# Altium PCB dctr_v1.3.pcbDoc
Units mil, origin at the board's own origin, x right, y up, seen from the top; angles counter-clockwise.
Board outline 7352.55 x 4561.21 mil, 2 copper layers (Top Layer, Bottom Layer); 53 components, 67 nets, 229 pads, 51 vias.
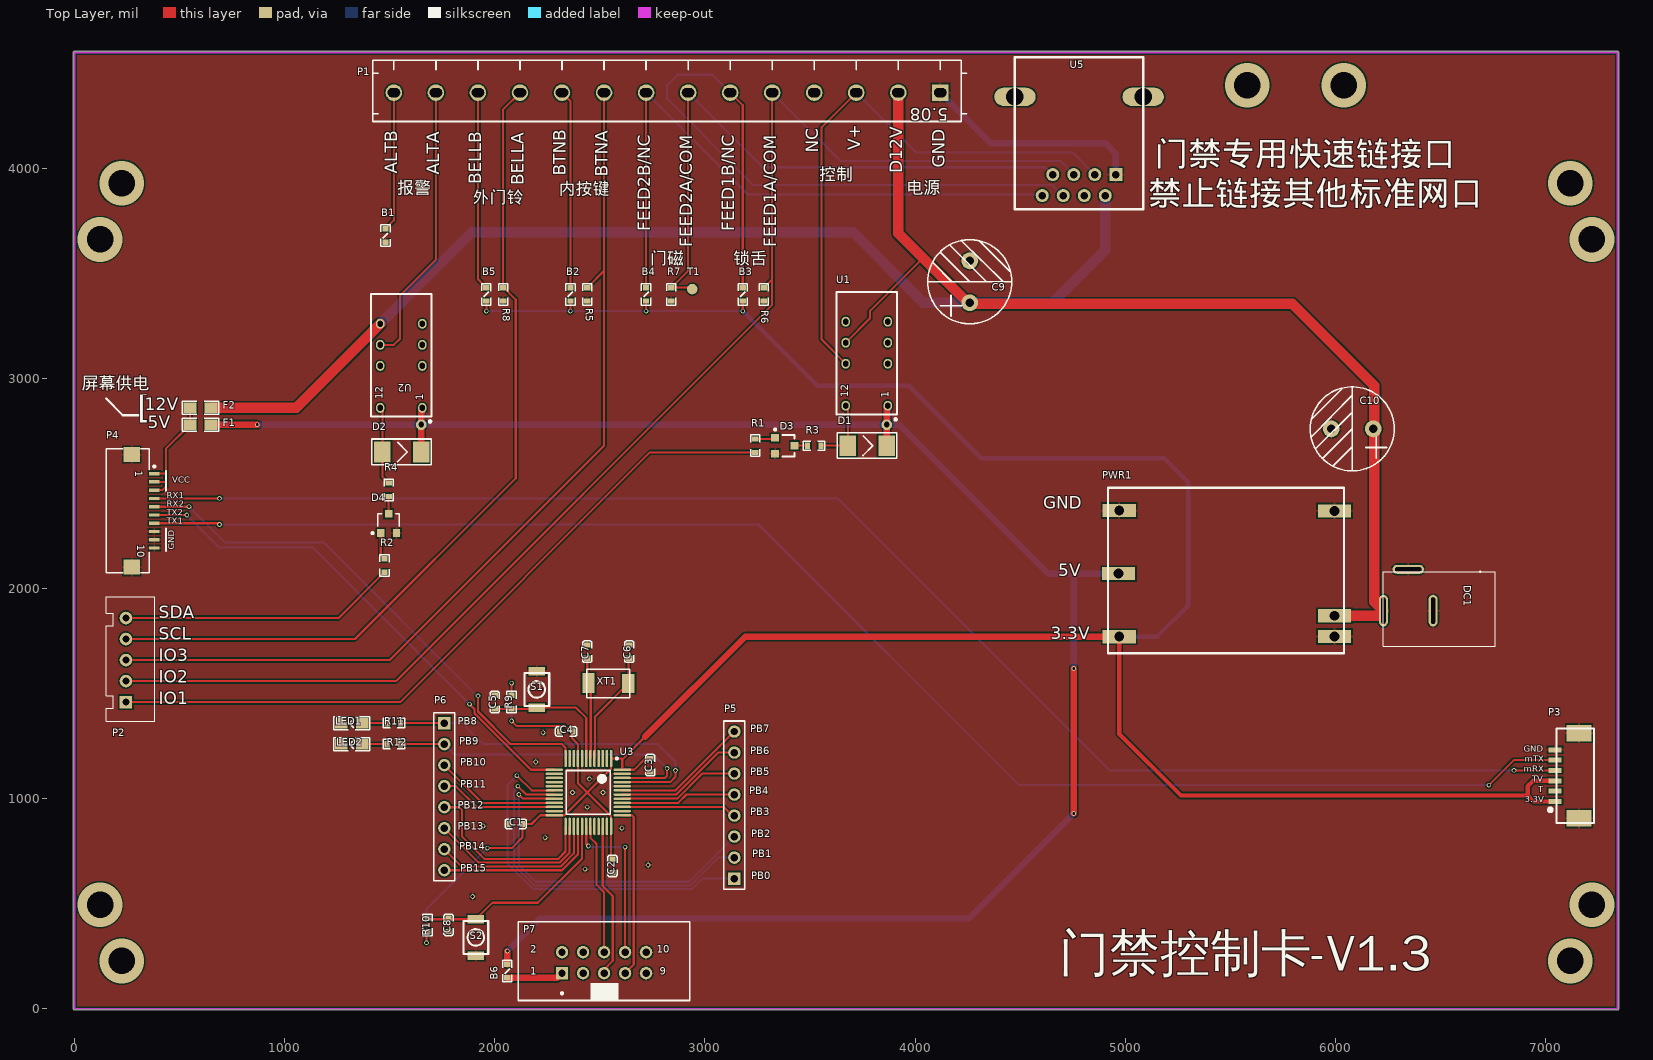
[diagram p0: Top Layer view]
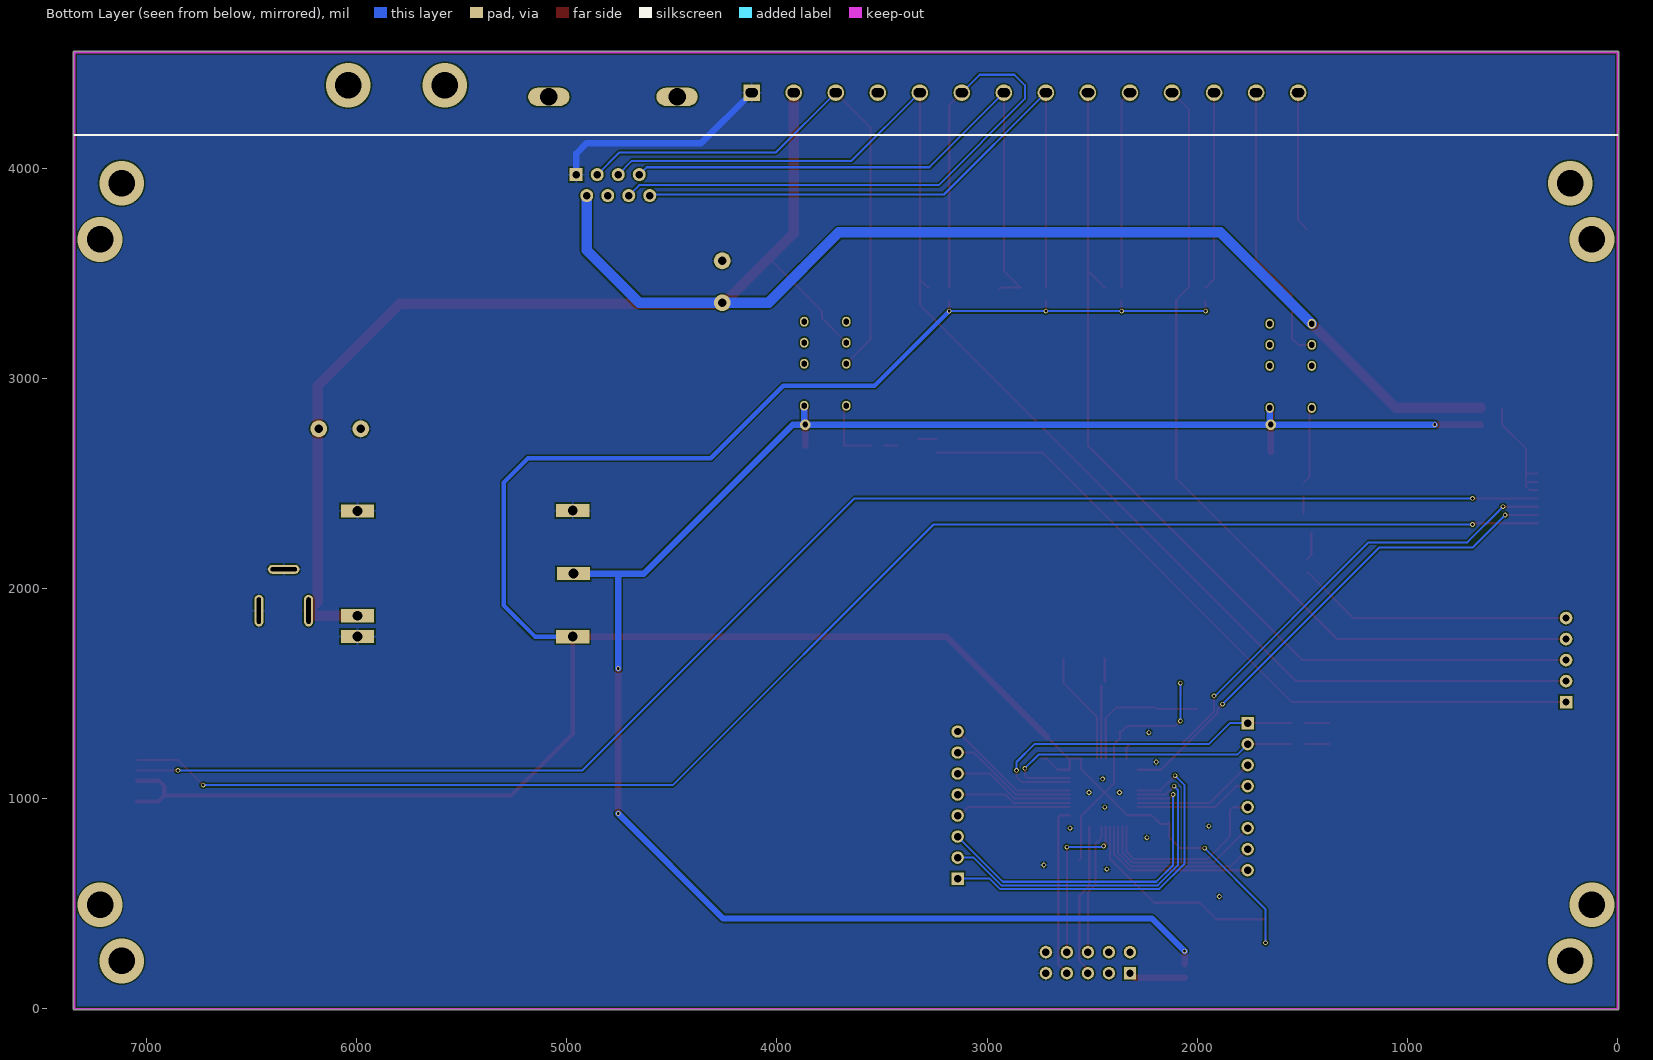
[diagram p1: Bottom Layer view, seen from below]

## Layer stack, top to bottom
Top Layer: signal copper 1.4
Dielectric: dielectric 12.6, FR-4, Dk 4.8
Bottom Layer: signal copper 1.4

## Board outline
0,-5.01 cw(c0,0) -5.01,0 -5.01,4551.18 cw(c0,4551.18) 0,4556.2 7342.52,4556.2 cw(c7342.52,4551.18) 7347.53,4551.18 cw(c7342.52,4551.18) 7347.5,4550.59 cw(c7342.52,4550) 7347.53,4550 7347.53,0 cw(c7342.52,0) 7342.52,-5.01

## Design rules (kind name [scope] priority, off if disabled: settings)
Clearance [All] p1: gap=7
ComponentClearance [All] p1: gap=0 collisioncheckmode=3 verticalgap=0 showdistances=FALSE
HoleSize [All] p1: absolutevalues=TRUE maxlimit=1000 minlimit=1 maxpercent=80.000 minpercent=20.000
HoleToHoleClearance [All] p1: gap=7 allowstackedmicrovias=TRUE
MinimumSolderMaskSliver [All] p1: minsoldermaskwidth=0
PolygonConnect [All] p1: connectstyle=Relief reliefconductorwidth=10 reliefentries=4 polygonreliefangle="90 Angle"
RoomDefinition MCU [InComponentClass('MCU')] p1: confinementstyle=ConfineIn formatcopy=TRUE lockcomponents=FALSE outline -1000,-1000 1000,-1000 1000,0 -1000,0
RoutingVias [All] p1: holewidth=14 width=22 viastyle="Through Hole" minholewidth=14 minwidth=22 maxholewidth=280 maxwidth=500
SilkToSilkClearance [All] p1: silktosilkclearance=0
SilkscreenOverComponentPads [All] p1: minsilkscreentomaskgap=0
SolderMaskExpansion [All] p1: expansion=4
TestPointUsage [All] p1: valid=0 allowmultiple=FALSE
Testpoint [All] p1: side=15 testpointundercomponent=TRUE minsize=40 maxsize=100 preferedsize=60 minholesize=0 maxholesize=40 preferedholesize=32 testpointgrid=1 style=1023 order=0123456789
Width [All] p1: maxlimit=100 minlimit=7 preferedwidth=7
18 further rules are at their usual default settings.

## Classes and differential pairs
component class MCU: B6 C1 C2 C3 C4 C5 C6 C7 C8 LED1 LED2 P5 P6 P7 R9 R10 R11 R12 S1 S2 U3 XT1
component class IO: B1 B2 B3 B4 B5 B? C9 C10 C11 D1 D2 D3 D4 D6 D? DC1 F1 F2 P1 P2 P3 P4 P8 PWR1 R1 R2 R3 R4 R5 R6 R7 R8 R? T1 U1 U2 U5

## Components (designator, comment, footprint, x,y, rotation, side; value= is the part's Value field where it differs from the comment)
B1 "BEAD" 0603L 1480,3680 r90 top
B2 "BEAD" 0603L 2360,3400 r90 top
B3 "BEAD" 0603L 3180,3400 r90 top
B4 "BEAD" 0603L 2720,3400 r90 top
B5 "BEAD" 0603L 1960,3400 r90 top
B6 "BEAD" 0603L 2060,180 r90 top
C1 "104" 0603C 2100,880 r0 top
C2 "104" 0603C 2560,680 r90 top
C3 "104" 0603C 2740,1160 r270 top
C4 "104" 0603C 2340,1320 r0 top
C5 "104" 0603C 2000,1460 r90 top
C6 "22P" 0603C 2640,1700 r90 top
C7 "22P" 0603C 2440,1700 r90 top
C8 "104" 0603C 1780,400 r90 top
C9 "220uF" RB.2/.4 4260,3360 r270 top
C10 "220uF" RB.2/.4 6180,2760 r0 top
D1 "D-S" DO-214AC(SMA) 3630,2620 r0 top
D2 "D-S" DO-214AC(SMA) 1415,2590 r0 top
D3 "AO3400A" SOT23A 3380,2680 r270 top
D4 "AO3400A" SOT23A 1495,2310 r0 top
DC1 "DC" DC005 6760,2080 r180 top
F1 "FUSE" 0805F 600,2780 r180 top
F2 "FUSE" 0805F 600,2860 r180 top
LED1 "LED" 0805D 1320,1360 r180 top
LED2 "LED" 0805D 1320,1260 r180 top
P1 "Header 14" KF128-5.08-14 3020,4360 r180 top
P2 "Header 5" XH2.54-5 245,1660 r90 top
P3 "Header 8" FPC/1.25T-6P 7045,1110 r90 top
P4 "Header 12" FFC/SM1.0-2H10 380,2370 r270 top
P5 "Header 8" HDR1X8 3140,620 r90 top
P6 "Header 8" HDR1X8 1760,1360 r270 top
P7 "Xdebug-V4" DC2.54-10 2520,220 r0 top
PWR1 "PWR-1" PWR-1 6040,2480 r180 top
R1 "10K" 0603R 3240,2680 r270 top
R2 "10K" 0603R 1475,2110 r270 top
R3 "10K" 0603R 3520,2680 r180 top
R4 "10K" 0603R 1495,2470 r270 top
R5 "10K" 0603R 2440,3400 r270 top
R6 "10K" 0603R 3280,3400 r270 top
R7 "10K" 0603R 2840,3400 r270 top
R8 "10K" 0603R 2040,3400 r270 top
R9 "10K" 0603R 2080,1460 r270 top
R10 "10K" 0603R 1680,400 r90 top
R11 "1.5K" 0603R 1520,1360 r180 top
R12 "1.5K" 0603R 1520,1260 r180 top
S1 "BUTTON" SW-3X4X2 2200,1520 r270 top
S2 "BUTTON" SW-3X4X2 1910,340 r270 top
T1 "TP" TP1 2940,3425 r0 top
U1 "JDQ(G6S-2)" JDQ-G6S-2 3770,3120 r90 top
U2 "JDQ(G6S-2)" JDQ-G6S-2 1555,3110 r90 top
U3 "STM32F103" LQFP48 2445,1030 r270 top
U5 "RJ45-DTE" RJ45 4780,4220 r0 top
XT1 "8M" 5032 2540,1550 r180 top

## Footprints (in the part's own frame and the unit in brackets; to place one, negate y for a bottom-side part, rotate by r counter-clockwise, add the part's x,y. Pads: shape width x height; smd on the part's side, far side on the other; paste and mask are expansions set on the pad)
0603C [mil]
  rect 25x30 smd: 1(-32,0) 2(32,0)
  silkscreen extent -51,-22 51,22
0603L [mil]
  rect 25x30 smd: 1(-32,0) 2(32,0)
  silkscreen extent -51,-22 51,22
0603R [mil]
  rect 25x30 smd: 1(-32,0) 2(32,0)
  silkscreen extent -51,-22 51,22
0805D [mil]
  rect 60x49.21 smd: A(-50,0) K(50,0)
  silkscreen extent -85,-31 86,32
0805F [mil]
  rect 60x49.21 smd: 1(-50,0) 2(50,0)
  silkscreen extent -87,-31 86,31
5032 [mm]
  rect 1.5x2.3 smd: 1(-2.438,0.025)
  rect 1.5x2.4 smd: 2(2.388,0)
  silkscreen extent -2.59,-1.7 2.59,1.75
DC2.54-10 [mm] "Connector; IDC, PCB Transition - 2 Rows, Thru-Hole; 10 Position; Vertical; Pitch 2.54 mm; Body 18.00 x 6.1 x 7.45 mm (LxWxH)"
  rect 1.5x1.5 hole 0.9: 1(-5.08,-1.27)
  round 1.5 hole 0.9: 2(-5.08,1.27) 3(-2.54,-1.27) 4(-2.54,1.27) 5(0,-1.27) 6(0,1.27) 7(2.54,-1.27) 8(2.54,1.27) 9(5.08,-1.27) 10(5.08,1.27)
  silkscreen extent -10.39,-4.57 10.36,4.93
DC005 [mm] "9*13.5*10( 外径5.5mm 内径2.1mm)"
  oval 1.1x3.8 hole 0.5 slot 3.2 at 90 deg: 1(13.5,4.7) 2(7.5,4.7)
  oval 3.8x1.1 hole 0.5 slot 3.2 at 0 deg: 3(10.5,-0.3)
  silkscreen extent 0,0 13.5,9
DO-214AC(SMA) [mm]
  rect 2x2.5 smd: A(1.27,1.524) K(5.969,1.524)
  silkscreen extent 0,0 7.19,3.1
FFC/SM1.0-2H10 [mm] "Connector; FH12 Series; 6 Position; 1.0mm Spaced Bottom Eccentric Contact"
  rect 0.4x1.25 smd: 1(-4.5,0) 2(-3.5,0) 3(-2.5,0) 4(-1.5,0) 5(-0.5,0) 6(0.5,0) 7(1.5,0) 8(2.5,0) 9(3.5,0) 10(4.5,0)
  rect 1.8x2 smd: 11(-6.8,-2.725) 12(6.8,-2.725)
  silkscreen extent -7.5,-5.82 7.5,0.13
FPC/1.25T-6P [mm]
  rect 0.6x1.6 smd: 1(-3.125,0) 2(-1.875,0) 3(-0.625,0) 4(0.625,0) 5(1.875,0) 6(3.125,0)
  rect 2x3 smd: 7(-5.15,-2.9) 8(5.15,-2.9)
  silkscreen extent -5.7,-4.7 5.7,0.71
HDR1X8 [mm]
  rect 1.5x1.5 hole 0.9: 1(0,0)
  round 1.5 hole 0.9: 2(2.54,0) 3(5.08,0) 4(7.62,0) 5(10.16,0) 6(12.7,0) 7(15.24,0) 8(17.78,0)
  silkscreen extent -1.27,-1.27 19.05,1.27
JDQ-G6S-2 [mm] "继电器（G6S-2） 5VDC"
  oval 1.2x1 hole 0.6 slot 0.7 at 0 deg: 1(-6.35,-2.54) 3(-1.27,-2.54) 4(1.27,-2.54) 5(3.81,-2.54) 8(3.81,2.54) 9(1.27,2.54) 10(-1.27,2.54) 12(-6.35,2.54)
  silkscreen extent -8.14,-3.65 7.4,3.65
KF128-5.08-14 [mm]
  rect 2x2 hole 1.1 slot 1.5 at 0 deg: 1(-27.94,0)
  round 2 hole 1.1 slot 1.5 at 0 deg: 2(-22.86,0) 3(-17.78,0) 4(-12.7,0) 5(-7.62,0) 6(-2.54,0) 7(2.54,0) 8(7.62,0) 9(12.7,0) 10(17.78,0) 11(22.86,0) 12(27.94,0) 13(33.02,0) 14(38.1,0)
  silkscreen extent -31.14,-3.9 40.64,3.5
LQFP48 [mm]
  oval 2.1x0.3 smd: 1(-4.1,2.75) 2(-4.1,2.25) 3(-4.1,1.75) 4(-4.1,1.25) 5(-4.1,0.75) 6(-4.1,0.25) 7(-4.1,-0.25) 8(-4.1,-0.75) 9(-4.1,-1.25) 10(-4.1,-1.75) 11(-4.1,-2.25) 12(-4.1,-2.75) 25(4.1,-2.75) 26(4.1,-2.25) 27(4.1,-1.75) 28(4.1,-1.25) 29(4.1,-0.75) 30(4.1,-0.25) 31(4.1,0.25) 32(4.1,0.75) 33(4.1,1.25) 34(4.1,1.75) 35(4.1,2.25) 36(4.1,2.75)
  oval 0.3x2.1 smd: 13(-2.75,-4.1) 14(-2.25,-4.1) 15(-1.75,-4.1) 16(-1.25,-4.1) 17(-0.75,-4.1) 18(-0.25,-4.1) 19(0.25,-4.1) 20(0.75,-4.1) 21(1.25,-4.1) 22(1.75,-4.1) 23(2.25,-4.1) 24(2.75,-4.1) 37(2.75,4.1) 38(2.25,4.1) 39(1.75,4.1) 40(1.25,4.1) 41(0.75,4.1) 42(0.25,4.1) 43(-0.25,4.1) 44(-0.75,4.1) 45(-1.25,4.1) 46(-1.75,4.1) 47(-2.25,4.1) 48(-2.75,4.1)
  silkscreen extent -4.22,-2.65 2.65,3.57
PWR-1 [mm]
  rect 4x1.6 hole 1.2: 1(1.125,17.975) 2(1.125,15.475) 3(1.125,2.8) 4(27.141,2.76) 5(27.225,10.38) 6(27.141,18)
  silkscreen extent 0,0 28.5,20
RB.2/.4 [mil] "10x12.5x5.0mm"
  round 80 hole 40: 1(0,0) 2(-200,0)
  silkscreen extent -300,-200 100,200
RJ45 [mil]
  oval 196.85x86.61 hole 82.68: 0(-305.12,120.08) 0(305.12,120.08)
  rect 62x62 hole 35: 1(175,-250)
  round 62 hole 35: 2(125,-350) 3(75,-250) 4(25,-350) 5(-25,-250) 6(-75,-350) 7(-125,-250) 8(-175,-350)
  silkscreen extent -305,-416 305,309
SOT23A [mm] "SOT-23; 3 Leads; Body 3.0 x 2.5 mm, inc. leads (LxW max)"
  rect 0.9x0.95 smd: 1(-0.95,-1.175) 2(0.95,-1.175) 3(0,1.175)
  silkscreen extent -2.07,-1.3 1.3,1.18
SW-3X4X2 [mm] "3X4X2 小龟二脚开关按键"
  rect 1x2 smd: 1(-2.2,0) 2(2.2,0)
  silkscreen extent -2,-1.5 2,1.5
TP1 [mil]
  round 50 smd: 1(0,0)
XH2.54-5 [mil]
  rect 60x60 hole 32: 1(-200,0)
  round 60 hole 32: 2(-100,0) 3(0,0) 4(100,0) 5(200,0)
  silkscreen extent -292,-136 301,94

## Part data
B1 B2 B3 B4 B5 B6: "磁珠"
C1 C2 C3 C4 C5 C6 C7 C8: library part CAP, "普通小电容"
C9 C10: library part CAP-E, "电解电容"
D1 D2: "肖特基二极管"
D3 D4: library part MOS-N, "NMOS"
DC1: library part DC00X, "圆形电源接口"
F1 F2: "CR-1812-050A60V"
P1: "Header, 14-Pin"
P2: "Header, 5-Pin"
P3 P5 P6: "Header, 8-Pin"
P4: "Header, 12-Pin"
P7: "单片机端"
R1 R2 R3 R4 R5 R6 R7 R8 R9 R10 R11 R12: library part RES, "普通电阻"
T1: "testpoint"
U1 U2: "继电器（G6S-2 5VDC）"
XT1: library part XT, "晶振"

## Via types
v1: diameter 22, hole 14, Top Layer to Bottom Layer, 39 vias
v2: diameter 212.6, hole 125.98, Top Layer to Bottom Layer, 8 vias
v3: diameter 212.6, hole 125.98, Top Layer to Bottom Layer, tented both sides, 2 vias
v4: diameter 50, hole 28, Top Layer to Bottom Layer, 2 vias

## Nets (pads, with @x,y where several pads share a name; then routed paths per layer and width w, separated by ;. In a path a pad name is that pad's centre, name@x,y a point inside that pad or via, vN(x,y) a via of type N, cw(c..) or ccw(c..) an arc to the next point about the centre after c; other vN are vias at no path point)
ALT_A: P1.13 U2.9 | length 1347.8
  Top Layer w10: U2.9 1520,3160 1550,3190 1550,3395 1720,3565 P1.13
ALT_B: B1.2 P1.14 | length 664.6
  Top Layer w10: B1.2 1520,3752 P1.14
BELL_A: P1.11 P2.4 R8.1 | length 4064.9
  Top Layer w10: P2.4 1335,1760 2100,2525 2100,3375 2040,3435 2040,4280 P1.11
BELL_B: B5.2 P1.12 | length 944.6
  Top Layer w10: P1.12 1920,3472 B5.2
BTN_A: P1.9 P2.3 R5.1 | length 4490.6
  Top Layer w10: P2.3 1500,1660 2520,2680 2520,3512 ; R5.1 2520,3512 ; P1.9 2520,3512
BTN_B: B2.2 P1.10 | length 944.6
  Top Layer w10: P1.10 2360,4320 B2.2
D3V3: B2.1 B3.1 B4.1 B5.1 C1.2 C2.2 C3.1 C4.2 P3.1 P3.3 PWR1.6 R9.1 R10.1 U3.1 U3.9 U3.24 U3.36 U3.48 | length 13255.7
  Top Layer w10: v1(1675,315) R10.1@1675,363 ; v1(1960,3320) B5.1 ; v1(1965,765) 2080,765 2132,817 C1.2 ; v1(2080,1370) 2103,1347 2332.5,1347 2359.5,1320 C4.2@2368,1320 ; R9.1 v1(2080,1550) ; C1.2@2132,888 2140,880 2175,880 2216.73,921.73 U3.24 2328.94,921.73 ; 2329.13,921.92 2331.92,921.92 2440,1030 ; v1(2360,3320) B2.1 ; C4.2 C4.2@2368,1320 ; C2.2 2553.27,718.73 U3.36 2553.08,868.77 2553.08,916.92 2440,1030 ; 2715,1295 2606.42,1186.42 ; v1(2720,3320) B4.1 ; C3.1 2717,1192 2663.27,1138.27 U3.48 2606.42,1186.42 ; v1(3180,3320) B3.1 ; C4.2@2368,1320 2368,1287 2395.79,1259.21 U3.9 2395.79,1074.21 2440,1030 ; 2440,1030 2553.27,1143.27 U3.1 2601.42,1191.42 2606.42,1186.42
  Top Layer w20: PWR1.6 4971.47,1308.53 5265,1015 6915,1015 ; P3.1 6943.03,986.97 6915,1015 ; P3.3 6940.39,1085.39 6915,1060 6915,1015
  Top Layer w30: 2715,1295 3191.34,1771.34 PWR1.6
  Bottom Layer w10: v1(1675,315) 1675,475 v1(1965,765) ; v1(1960,3320) v1(2360,3320) v1(2720,3320) v1(3180,3320) ; v1(2080,1370) v1(2080,1550)
  Bottom Layer w20: v1(3180,3320) 3535,2965 3970,2965 4315,2620 5185,2620 5300,2505 5300,1920 5151.34,1771.34 PWR1.6
D5V: B6.2 D1.K D2.K F1.1 PWR1.5 U1.1 U2.1 | length 9342.3
  Top Layer w30: F1.1 v1(870,2780) ; D2.K v4(1650,2780) U2.1@1650,2855 ; B6.2 v1(2060,275) ; D1.K v4(3865,2780) U1.1@3865,2865 ; v1(4755,930) v1(4755,1620)
  Bottom Layer w30: v1(870,2780) v4(1650,2780) v4@1655,2780 ; U2.1 v4@1655,2780 ; v1(2060,275) 2215,430 4255,430 v1(4755,930) ; U1.1 v4@3870,2780 ; v1(4755,1620) 4755,2071.34 ; PWR1.5 4755,2071.34 ; v4@1655,2780 v4(3865,2780) v4@3870,2780 ; v4@3870,2780 3925,2780 4633.66,2071.34 4755,2071.34
D12V: C9.1 C10.1 DC1.1 F2.1 P1.2 PWR1.2 U1.9 U2.8 U5.2 | length 10206.4
  Top Layer w10: U1.9 3785,3285 3785,3320 4025,3560
  Top Layer w50: F2.1 1055,2860 U2.8 ; P1.2 3920,3690 4255,3355 5795,3355 6185,2965 6185,1938.46 DC1.1 6204.29,1870.75 PWR1.2
  Bottom Layer w50: U2.8 1890,3695 3705,3695 4040,3360 C9.1 4655,3360 4905,3610 U5.2
FEED1_A: P1.5 P2.2 R6.1 U5.5 | length 6479.6
  Top Layer w10: P2.2 1530,1560 3320,3350 3320,3472 ; R6.1 3320,3472 ; P1.5 3320,3472
  Bottom Layer w10: P1.5 3645,4035 4690,4035 U5.5
FEED1_B: B3.2 P1.6 U5.6 | length 3449.3
  Top Layer w10: P1.6 3180,4300 B3.2
  Bottom Layer w10: P1.6 3035,4445 2870,4445 2820,4395 2820,4330 3230,3920 4655,3920 U5.6
FEED2_A: P1.7 R7.1 T1.1 U5.7 | length 2960.6
  Top Layer w10: P1.7 2920,3512 R7.1 2933,3432 T1.1
  Bottom Layer w10: P1.7 3275,4005 4620,4005 U5.7
FEED2_B: B4.2 P1.8 U5.8 | length 3016
  Top Layer w10: B4.2 P1.8
  Bottom Layer w10: P1.8 3205,3875 4600,3875 U5.8
GND: B1.1 C1.1 C2.1 C3.2 C4.1 C5.2 C6.2 C7.2 C8.1 C9.2 C10.2 D3.2 D4.2 DC1.2 DC1.3 LED1.K LED2.K P1.1 P3.6 P3.7 P3.8 P4.8 P4.9 P4.10 P4.11 P4.12 P7.9 P7.10 PWR1.1 PWR1.3 PWR1.4 R5.2 R6.2 R7.2 R8.2 S1.1 S2.2 U3.8 U3.23 U3.35 U3.44 U3.47 U5.1 | length 1055.1
  Bottom Layer w30: P1.1 4361,4119 4906,4119 4955,4070 U5.1
  other v1: 1895,535 2430,665 2730,685 2240,815 2605,860 1945,870 2440,960 2370,1030 2515,1030 2450,1095 2195,1175 2230,1315
IO1: P2.1 R1.2 | length 3487.1
  Top Layer w10: P2.1 1550,1460 2738,2648 R1.2
LOCK_V+: P1.3 U1.10 U5.3 | length 2702.5
  Top Layer w10: U1.10 3555,3185 3555,4195 P1.3
  Bottom Layer w10: P1.3 4005,4075 4750,4075 U5.3
NetB6_1: B6.1 P7.1 | length 269.1
  Top Layer w30: B6.1 2298,148 P7.1
NetC6_1: C6.1 U3.5 XT1.1 | length 539.5
  Top Layer w10: U3.5 2476.31,1193.2 2476.31,1389.31 XT1.1 C6.1@2636,1664
NetC7_1: C7.1 U3.6 XT1.2 | length 460.8
  Top Layer w10: XT1.2@2440,1556 C7.1 ; U3.6 2456.5,1193.07 XT1.2@2456.5,1539.5
NetD1_A: D1.A R3.1 U1.12 | length 308
  Top Layer w10: R3.1 D1.A U1.12@3680,2860
NetD2_A: D2.A R4.1 U2.12 | length 360.4
  Top Layer w10: U2.12@1465,2850 D2.A 1465,2532 R4.1
NetD3_1: D3.1 R1.1 | length 88.3
  Top Layer w10: R1.1 D3.1@3328.34,2712
NetD3_3: D3.3 R3.2 | length 61.7
  Top Layer w10: D3.3 R3.2
NetD4_1: D4.1 R2.1 | length 128.9
  Top Layer w10: D4.1 1457.6,2159.4 R2.1
NetD4_3: D4.3 R4.2 | length 81.7
  Top Layer w10: D4.3 R4.2
NetF1_2: F1.2 F2.2 P4.1 P4.2 P4.3 | length 588.9
  Top Layer w10: P4.3 418.43,2468.43 435,2485 435,2665 F1.2 F2.2 ; P4.2 432.2,2507.8 ; P4.1 432.17,2547.17
NetLED1_A: LED1.A R11.2 | length 118
  Top Layer w10: LED1.A R11.2
NetLED2_A: LED2.A R12.2 | length 118
  Top Layer w10: LED2.A R12.2
PA0: U3.10
PA1: U3.11
PA4: U3.14
PA5: U3.15
PA6: U3.16
PA7: U3.17
PA8: C8.2 R10.2 S2.1 U3.29 | length 1008.2
  Top Layer w10: R10.2@1680,426.61 S2.1 1988.39,505 2205,505 2415.47,715.47 U3.29
PA9: P7.8 U3.30 | length 774.7
  Top Layer w10: U3.30 2435.16,784.84 v1(2445,775) ; P7.8 v1(2620,770)
  Bottom Layer w10: v1(2445,775) 2450,770 v1(2620,770)
PA10: P7.6 U3.31 | length 625.6
  Top Layer w10: U3.31 2454.84,815.16 2485,785 2485,590 2520,555 P7.6
PA11: U3.32
PA12: U3.33
PA13: P7.5 U3.34 | length 735.5
  Top Layer w10: U3.34 2513.9,585.14 2561.53,537.51 2561.53,228.47 2520,186.94 P7.5
PA14: P7.7 U3.37 | length 819.2
  Top Layer w10: U3.37 2653.27,921.73 2661.53,913.47 2661.53,211.53 P7.7
PA15: U3.38
PB0: P5.1 U3.18 | length 1794.7
  Top Layer w10: v1(2105,1110) 2175.16,1039.84 U3.18
  Bottom Layer w10: v1(2105,1110) 2060,1065 2060,691.92 2180.92,571 2939.08,571 2988.08,620 P5.1
PB1: P5.2 U3.19 | length 1716
  Top Layer w10: v1(2110,1060) 2149.84,1020.16 U3.19
  Bottom Layer w10: v1(2110,1060) 2092,1042 2092,683.96 2187.96,588 2932.04,588 3064.04,720 P5.2
PB2: P5.3 U3.20 | length 1658.9
  Top Layer w10: v1(2115,1020) 2134.53,1000.47 U3.20
  Bottom Layer w10: v1(2115,1020) 2115,685 2195,605 2925,605 P5.3
PB3: P5.4 U3.39 | length 547.7
  Top Layer w10: U3.39 3088.9,961.1 P5.4@3135,915
PB4: P5.5 U3.40 | length 549.8
  Top Layer w10: U3.40 2872.91,980.79 2912.12,1020 P5.5
PB5: P5.6 U3.41 | length 583.1
  Top Layer w10: U3.41 2868.56,1000.47 2988.08,1120 P5.6
PB6: P5.7 U3.42 | length 616.4
  Top Layer w10: U3.42 2864.2,1020.16 3064.04,1220 P5.7
PB7: P5.8 U3.43 | length 649.6
  Top Layer w10: U3.43 2859.84,1039.84 P5.8
PB8: P6.1 R11.1 U3.45 | length 1718.9
  Top Layer w10: R11.1 P6.1 ; U3.45 2834.21,1079.21 2860,1105 v1(2860,1135)
  Bottom Layer w10: P6.1 1845,1360 1945,1260 2775,1260 2860,1175 v1(2860,1135)
PB9: P6.2 R12.1 U3.46 | length 1568.8
  Top Layer w10: R12.1 P6.2 ; U3.46 2808.9,1098.9 2820,1110 v1(2820,1145)
  Bottom Layer w10: P6.2 1810,1210 2755,1210 v1(2820,1145)
PB10: P6.3 U3.21 | length 597.8
  Top Layer w10: P6.3 1939.21,980.79 U3.21
PB11: P6.4 U3.22 | length 564.5
  Top Layer w10: P6.4 1815,1060 1913.9,961.1 U3.22
PB12: P6.5 U3.25 | length 886.8
  Top Layer w10: P6.5 1760.5,959.5 1830.5,959.5 1845,945 1845,820 1952,713 2300.88,713 2336.73,748.86 U3.25
PB13: P6.6 U3.26 | length 808.5
  Top Layer w10: P6.6 1924,696 2307.92,696 2356.42,744.5 U3.26
PB14: P6.7 U3.27 | length 805.1
  Top Layer w10: P6.7 1843,677 2312.96,677 2376.1,740.14 U3.27
PB15: P6.8 U3.28 | length 800
  Top Layer w10: P6.8 2320,660 2395.79,735.79 U3.28
PC13: U3.2
PC14: U3.3
PC15: U3.4
RST: C5.1 R9.2 S1.2 U3.7 | length 643.3
  Top Layer w10: C5.1 R9.2 S1.2@2194.61,1428 ; S1.2 2386.61,1433.39 2435.16,1384.84 U3.7
RX1: P3.4 P4.4 | length 7201.2
  Top Layer w10: P4.4 v1(690,2429.06) ; v1(6850,1135) 6850.39,1134.61 P3.4
  Bottom Layer w10: v1(690,2429.06) 3630.94,2429.06 4925,1135 v1(6850,1135)
RX2: P4.5 U3.12 | length 2527.6
  Top Layer w10: P4.5 544.68,2389.68 v1(545,2390) ; v1(1920,1490) 1920,1415 2075,1260 2320,1260 2336.73,1243.27 U3.12
  Bottom Layer w10: v1(545,2390) 715,2220 1185,2220 1915,1490 v1(1920,1490)
SDA: P2.5 R2.2 | length 1320.3
  Top Layer w10: P2.5 1257,1860 R2.2
TX1: P3.5 P4.7 | length 7230.3
  Top Layer w10: P4.7 684.06,2310.94 v1(690,2305) ; v1(6730,1065) 6848.82,1183.82 P3.5
  Bottom Layer w10: v1(690,2305) 3255,2305 4495,1065 v1(6730,1065)
TX2: P4.6 U3.13 | length 2416.8
  Top Layer w10: P4.6 534.69,2350.31 v1(535,2350) ; v1(1880,1450) 1903,1427 1903,1407.96 2172.69,1138.27 U3.13
  Bottom Layer w10: v1(535,2350) 690,2195 1135,2195 v1(1880,1450)
pads on no net: P1.4 P3.2 P7.2 P7.3 P7.4 U1.3 U1.4 U1.5 U1.8 U2.3 U2.4 U2.5 U2.10 U5.0 U5.4
copper on no net:
  other v2: 224.41,228.35 7118.11,228.35 122.05,496.06 7220.47,496.06 122.05,3661.42 7220.47,3661.42 224.41,3929.13 7118.11,3929.13
  other v3: 5580,4395 6040,4395

## Polygon pours and split planes (outlines as drawn)
GND on Top Layer "Top Layer-No Net" (solid, remove dead copper): 7342.52,4551.18 7342.52,0 0,0 0,4551.18
GND on Bottom Layer "Top Layer-No Net" (solid, remove dead copper): 7342.52,4550 7342.52,0 0,0 0,4551.18

## Keep-outs
Keep-Out Layer:
  lines w10: 7342.52,4550 7342.52,0 0,0 0,4551.18 7342.52,4551.18

## Silkscreen, mask and mechanical layers (free items; w line width, h text height)
Top Overlay:
  lines w10: 150,2905 230,2825 305,2825 ; 435,2180 435,2285 ; 435,2465 435,2560
  text "V+" at 3758.32,4085.63 h100 r90
  text "NC" at 3559.09,4073.33 h100 r90
  text "GND" at 4160,4002.96 h100 r90
  text "D12V" at 3958.92,3976.02 h100 r90
  text "门禁专用快速链接口" at 5140,3975 h200
  text "ALTB" at 1555,3973 h100 r90
  text "ALTA" at 1755.3,3968.21 h100 r90
  text "BTNB" at 2356.21,3964.8 h100 r90
  text "BTNA" at 2556.51,3960.02 h100 r90
  text "BELLB" at 1955.6,3924.78 h100 r90
  text "控制" at 3545,3925 h100
  text "BELLA" at 2155.91,3920 h100 r90
  text "报警" at 1535,3860 h100
  text "电源" at 3960,3860 h100
  text "内按键" at 2305,3855 h100
  text "外门铃" at 1895,3815 h100
  text "禁止链接其他标准网口" at 5110,3785 h200
  text "FEED2B/NC" at 2757.89,3700.69 h100 r90
  text "FEED1B/NC" at 3158.49,3700.69 h100 r90
  text "FEED2A/COM" at 2958.19,3624.37 h100 r90
  text "FEED1A/COM" at 3358.79,3624.37 h100 r90
  text "门磁" at 2740,3525 h100
  text "锁舌" at 3135,3525 h100
  text "屏幕供电" at 35,2930 h100
  text "12V" at 335,2830 h100
  text "[" at 300,2775 h200
  text "5V" at 350,2745 h100
  text "VCC" at 465,2495 h50
  text "RX1" at 440,2420 h50
  text "RX2" at 440,2380 h50
  text "GND" at 4610,2360 h100
  text "TX2" at 440,2340 h50
  text "TX1" at 440,2300 h50
  text "GND" at 485,2185 h50 r90
  text "5V" at 4680,2040 h100
  text "SDA" at 400,1840 h100
  text "3.3V" at 4645,1740 h100
  text "SCL" at 400,1737.5 h100
  text "IO3" at 400,1635 h100
  text "IO2" at 400,1532.5 h100
  text "IO1" at 400,1430 h100
  text "PB8" at 1825,1340 h60
  text "PB7" at 3215,1305 h60
  text "PB9" at 1830,1245 h60
  text "GND" at 6896.63,1215 h50
  text "PB6" at 3215,1200 h60
  text "mTX" at 6900,1166.46 h50
  text "PB10" at 1835,1145 h60
  text "mRX" at 6895.02,1118.46 h50
  text "PB5" at 3215,1100 h60
  text "TV" at 6935.53,1070.46 h50
  text "PB11" at 1835,1040 h60
  text "T" at 6965.93,1022.46 h50
  text "PB4" at 3210,1010 h60
  text "3.3V" at 6901.46,975 h50
  text "PB12" at 1825,940 h60
  text "PB3" at 3215,910 h60
  text "PB13" at 1825,840 h60
  text "PB2" at 3220,805 h60
  text "PB14" at 1830,745 h60
  text "PB1" at 3225,710 h60
  text "PB15" at 1835,640 h60
  text "PB0" at 3220,605 h60
  text "门禁控制卡-V1.3" at 4685,125 h300
Bottom Overlay:
  lines w10: 0,4157.48 7342.52,4157.48

## Text inside footprints (layer, text, board x,y; h text height)
P1: Top Overlay "5.08" at 4157.01,4304.88 h100 r180
P4: Top Overlay "10" at 286.5,2208.58 h59.06 r270; Top Overlay "1" at 277.31,2560.01 h59.06 r270
P7: Top Overlay "9" at 2785,150 h59.06; Top Overlay "10" at 2770,255 h59.06; Top Overlay "1" at 2170,150 h59.06; Top Overlay "2" at 2170,255 h59.06
U1: Top Overlay "1" at 3887,2907 h60 r90; Top Overlay "12" at 3694,2910 h60 r90
U2: Top Overlay "12" at 1479,2900 h60 r90; Top Overlay "1" at 1672,2897 h60 r90